# EAGLE board pinheader_breakout (EAGLE 7.4.0)
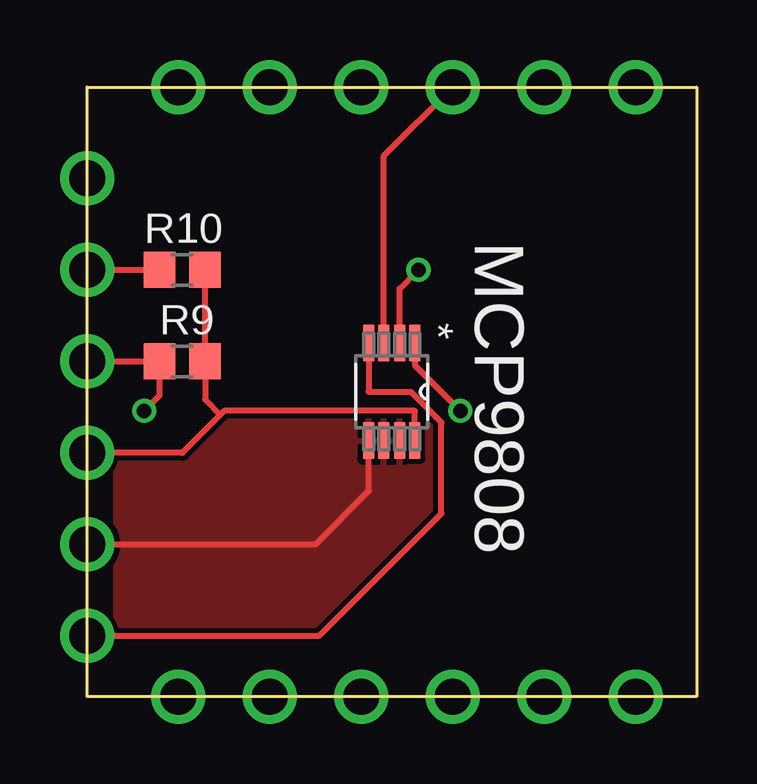
[diagram p0: board, top side]
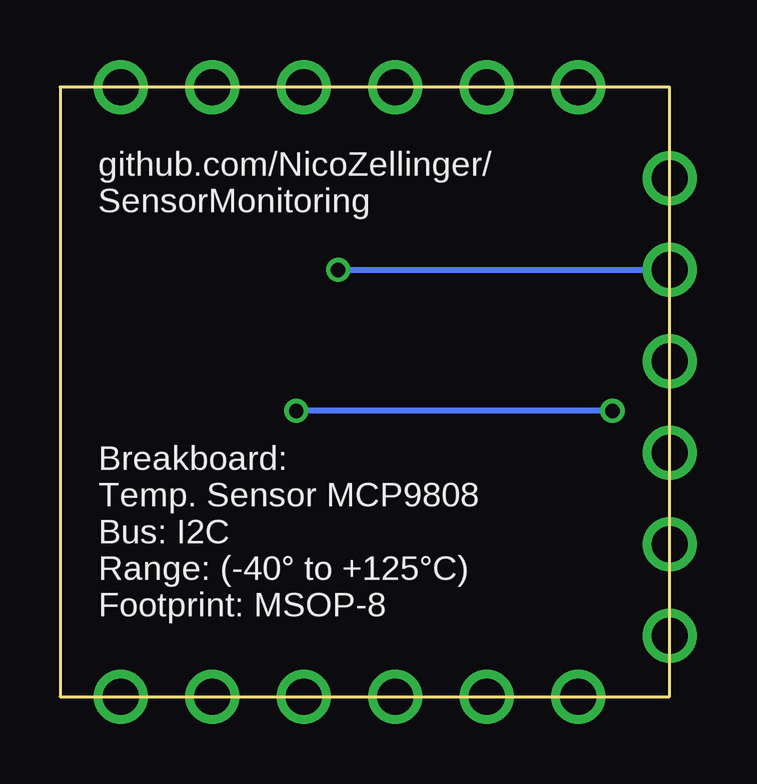
[diagram p1: board, bottom side, seen from below]

Size 25.4 x 25.4 mm. Coordinates in mm from the lower left corner, seen from the top.
Outline: 0,0 25.4,0 25.4,25.4 0,25.39 0,0
Copper layers (1*16): Top 0.035mm / dielectric 1.5mm / Bottom 0.035mm
Design rules "default": minimum track width 10mil, minimum drill 24mil, track to track 8mil, track to pad 8mil, pad to pad 8mil, via to via 8mil, smd to smd 8mil, copper to edge 40mil, drill to drill 8mil, minimum pad ring 10mil, minimum via ring 8mil, stop-mask expansion 4mil, vias tented up to drill 0mil, thermal gap 10mil

## Footprints (pad centres in the part's own frame; a part is rotated, then mirrored left to right if it is on the bottom)
SOP65P490X110-8N = smd 1.524 x 0.457: 1 -2.032,0.965; 2 -2.032,0.33; 3 -2.032,-0.33; 4 -2.032,-0.965; 5 2.032,-0.965; 6 2.032,-0.33; 7 2.032,0.33; 8 2.032,0.965
R0805 = smd 1.3 x 1.5: 1 -0.95,0; 2 0.95,0
BREAKOUT_V1 = drill 1.5: P$1 3.81,0; P$2 7.62,0; P$3 11.43,0; P$4 15.24,0; P$5 19.05,0; P$6 22.86,0; P$7 22.86,25.4; P$8 19.05,25.4; P$9 15.24,25.4; P$10 11.43,25.4; P$11 7.62,25.4; P$12 3.81,25.4; P$13 0,21.59; P$14 0,17.78; P$15 0,13.97; P$16 0,10.16; P$17 0,6.35; P$18 0,2.54

## Placement (x,y rotation side)
MCP9808  MCP9808-E/MS  [SOP65P490X110-8N]  12.7,12.7 270 top
R9  1k8  [R0805]  3.97,13.97 0 top
R10  1k8  [R0805]  3.97,17.78 0 top
U$1  BREAKOUT_V1  [BREAKOUT_V1]  0,0 0 top

## Library data of the parts
MCP9808 = mcp9808; MPN: MCP9808-E/MS; OC_FARNELL: 2080523; OC_NEWARK: 89T8871; PACKAGE: MSOP-8; SUPPLIER: MICROCHIP
R9 R10 = rcl
U$1 = breakout_base

## Nets
+3V3: MCP9808.8 R9.2 R10.2 U$1.P$16
ALERT: MCP9808.3 U$1.P$9
GND: MCP9808.5 MCP9808.6 MCP9808.7 U$1.P$17
GNDIO: MCP9808.4 U$1.P$18
MISO: U$1.P$12
MOSI: U$1.P$13
NSS: U$1.P$10
PA4: U$1.P$3
PA5: U$1.P$4
PA6: U$1.P$5
PA7: U$1.P$6
PB0: U$1.P$7
PB1: U$1.P$8
RX: U$1.P$2
SCK: U$1.P$11
SCL: MCP9808.2 R10.1 U$1.P$14
SDA: MCP9808.1 R9.1 U$1.P$15
TX: U$1.P$1

## Tracks (layer width: path | path; a pad name or v marks a point on that pad's centre or on a via)
+3V3
  Top 0.254: R10.2 R9.2 4.92,12.38 5.56,11.75 | U$1.P$16 3.97,10.16 5.56,11.75 | 5.56,11.75 5.71,11.91 13.65,11.91 13.66,11.89 MCP9808.8
ALERT
  Top 0.254: MCP9808.3 12.37,22.53 U$1.P$9
GND
  Top 0.254: U$1.P$17 9.53,6.35 11.75,8.57 11.75,10.65 MCP9808.5
  pour Top: 0,25.4 25.4,25.4 25.4,0 0,0
GNDIO
  Top 0.254: U$1.P$18 9.68,2.54 14.76,7.62 14.76,11.43 13.49,12.7 11.75,12.7 11.73,12.71 MCP9808.4
SCL  (via drill 0.6)
  Top 0.254: U$1.P$14 R10.1 | MCP9808.2 13.03,17 v13.81,17.78
  Bottom 0.254: v13.81,17.78 U$1.P$14
SDA  (via drill 0.6)
  Top 0.254: U$1.P$15 R9.1 | R9.1 | R9.1 3.02,12.54 v2.38,11.91 | MCP9808.1 13.66,13.8 v15.56,11.91
  Bottom 0.254: v2.38,11.91 v15.56,11.91

## Text on the board
bNames: github.com/NicoZellinger/ / SensorMonitoring | Breakboard: / Temp. Sensor MCP9808 / Bus: I2C / Range: (-40° to +125°C) / Footprint: MSOP-8